# EAGLE board mainboard (EAGLE 7.5.0)
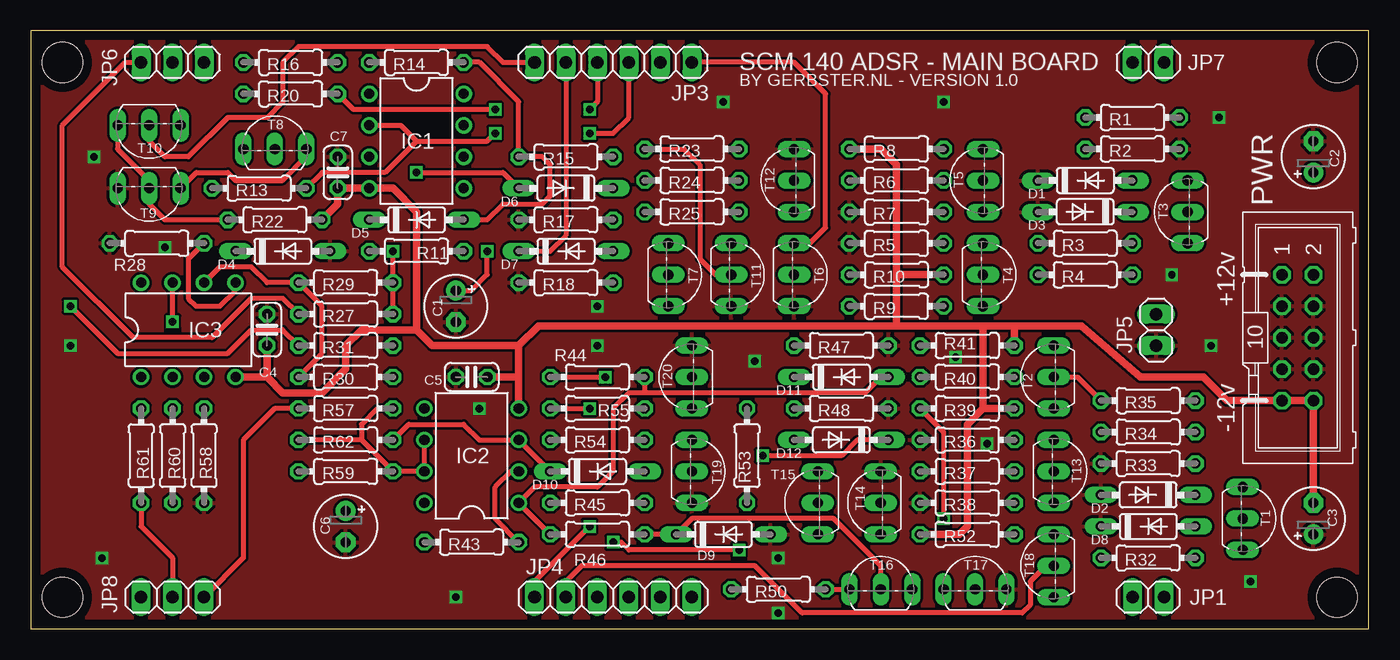
[diagram p0: board, top side]
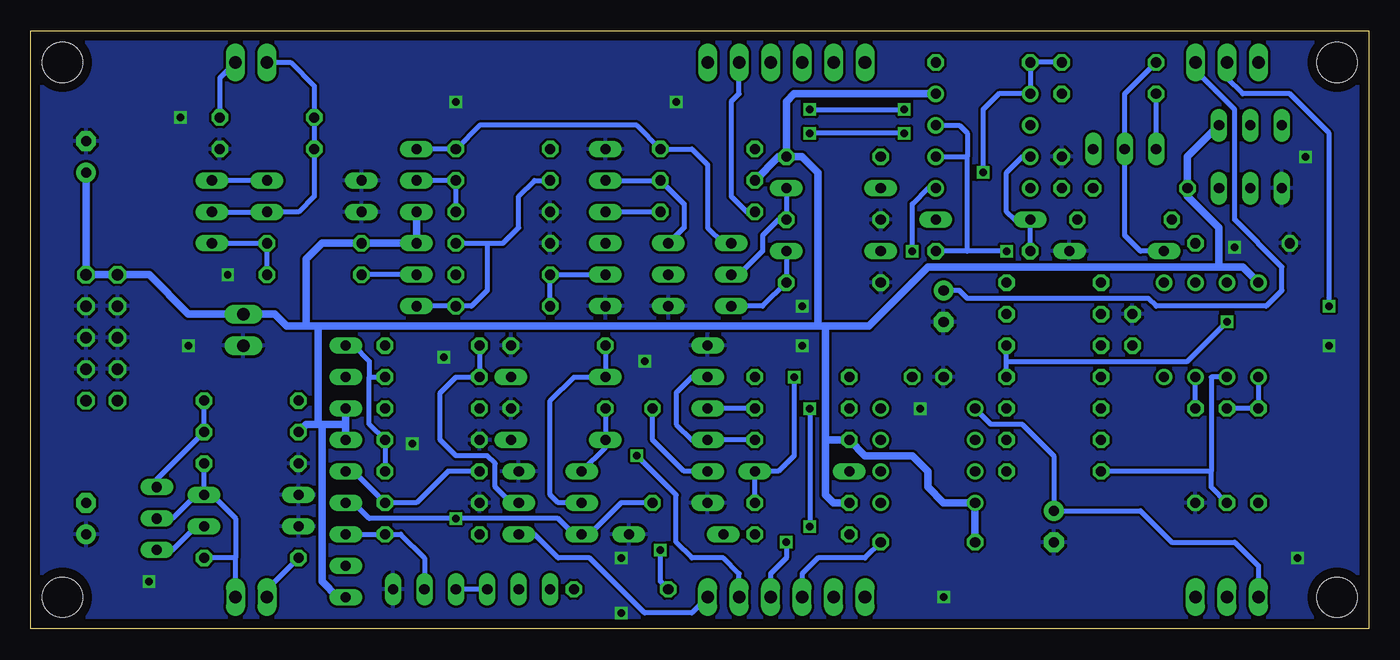
[diagram p1: board, bottom side, seen from below]

Size 107.95 x 48.26 mm. Coordinates in mm from the lower left corner, seen from the top.
Outline: 0,0 107.95,0 107.95,48.26 0,48.26 0,0
Copper layers (1*16): Top 0.035mm / dielectric 1.5mm / Bottom 0.035mm
Design rules "PCBWay": minimum track width 10mil, minimum drill 6mil, track to track 8mil, track to pad 8mil, pad to pad 8mil, via to via 8mil, smd to smd 8mil, copper to edge 30mil, drill to drill 8mil, minimum pad ring 10mil, minimum via ring 8mil, stop-mask expansion 4mil, vias tented up to drill 0mil, thermal gap 10mil
Holes 3.21 mm at 2.54,2.54 2.54,45.72 105.41,45.72 105.41,2.54

## Footprints (pad centres in the part's own frame; a part is rotated, then mirrored left to right if it is on the bottom)
E2,5-5 = drill 0.813 pad 1.6: + -1.27,0 | drill 0.813 pad 1.6 octagon: - 1.27,0
C025-024X044 = drill 0.813 octagon: 1 -1.27,0; 2 1.27,0
DO35-7 = drill 0.813 long: A 3.81,0; C -3.81,0
DIL08 = drill 0.813 pad 1.27: 1 -3.81,-3.81; 2 -1.27,-3.81; 3 1.27,-3.81; 4 3.81,-3.81; 5 3.81,3.81; 6 1.27,3.81; 7 -1.27,3.81; 8 -3.81,3.81
1X02 = drill 1.016 long: 1 -1.27,0; 2 1.27,0
1X06 = drill 1.016 long: 1 -6.35,0; 2 -3.81,0; 3 -1.27,0; 4 1.27,0; 5 3.81,0; 6 6.35,0
1X03 = drill 1.016 long: 1 -2.54,0; 2 0,0; 3 2.54,0
ML10 = drill 0.914 octagon: 1 -5.08,-1.27; 2 -5.08,1.27; 3 -2.54,-1.27; 4 -2.54,1.27; 5 0,-1.27; 6 0,1.27; 7 2.54,-1.27; 8 2.54,1.27; 9 5.08,-1.27; 10 5.08,1.27
0204/7 = drill 0.813 octagon: 1 -3.81,0; 2 3.81,0
TO92-CBE = drill 0.813 long: B 0,0; C -2.54,0; E 2.54,0
TO92-EBC = drill 0.813 long: B 0,-1.27; C 2.54,-1.27; E -2.54,-1.27

## Placement (x,y rotation side)
C1  3.3u/35v  [E2,5-5]  34.29,26.04 270 top
C2  47u/16v  [E2,5-5]  103.5,38.1 90 top
C3  47u/16v  [E2,5-5]  103.5,8.89 90 top
C4  0.01u  [C025-024X044]  19.05,24.13 90 top
C5  0.01u  [C025-024X044]  35.56,20.32 180 top
C6  3.3u/35v  [E2,5-5]  25.4,8.26 270 top
C7  0.01u  [C025-024X044]  24.77,36.83 90 top
D1  [DO35-7]  85.09,33.66 180 top
D2  [DO35-7]  90.17,10.79 180 top
D3  [DO35-7]  85.09,36.2 0 top
D4  [DO35-7]  20.32,30.48 0 top
D5  [DO35-7]  31.11,33.02 0 top
D6  [DO35-7]  43.18,35.56 180 top
D7  [DO35-7]  43.18,30.48 0 top
D8  [DO35-7]  90.17,8.26 0 top
D9  [DO35-7]  55.88,7.62 0 top
D10  [DO35-7]  45.72,12.7 0 top
D11  [DO35-7]  65.41,20.32 0 top
D12  [DO35-7]  65.41,15.24 180 top
IC1  LM4558N  [DIL08]  31.11,39.37 270 top
IC2  LM4558N  [DIL08]  35.56,13.97 90 top
IC3  LM4558N  [DIL08]  12.7,24.13 0 top
JP1  [1X02]  90.17,2.54 180 top
JP3  [1X06]  46.99,45.72 180 top
JP4  [1X06]  46.99,2.54 0 top
JP5  [1X02]  90.81,24.13 90 top
JP6  [1X03]  11.43,45.72 180 top
JP7  [1X02]  90.17,45.72 0 top
JP8  [1X03]  11.43,2.54 0 top
PWR  [ML10]  102.23,23.5 270 top
R1  33k  [0204/7]  88.9,41.27 180 top
R2  22k  [0204/7]  88.9,38.73 180 top
R3  10k  [0204/7]  85.09,31.11 180 top
R4  22k  [0204/7]  85.09,28.57 180 top
R5  10k  [0204/7]  69.85,31.11 0 top
R6  22k  [0204/7]  69.85,36.2 0 top
R7  150k  [0204/7]  69.85,33.66 0 top
R8  47k  [0204/7]  69.85,38.73 0 top
R9  56k  [0204/7]  69.85,26.04 0 top
R10  560k  [0204/7]  69.85,28.57 180 top
R11  47k  [0204/7]  31.11,30.48 0 top
R13  47k  [0204/7]  18.41,35.56 180 top
R14  56k  [0204/7]  31.11,45.72 0 top
R15  22k  [0204/7]  43.18,38.1 0 top
R16  100k  [0204/7]  20.95,45.72 0 top
R17  47k  [0204/7]  43.18,33.02 0 top
R18  33k  [0204/7]  43.18,27.94 0 top
R20  330  [0204/7]  20.95,43.18 0 top
R22  15k  [0204/7]  19.68,33.02 180 top
R23  100k  [0204/7]  53.34,38.73 180 top
R24  10k  [0204/7]  53.34,36.2 180 top
R25  330  [0204/7]  53.34,33.66 180 top
R27  1k  [0204/7]  25.4,25.4 180 top
R28  47k  [0204/7]  10.16,31.11 0 top
R29  100k  [0204/7]  25.4,27.94 0 top
R30  100k  [0204/7]  25.4,20.32 0 top
R31  1k  [0204/7]  25.4,22.86 180 top
R32  33k  [0204/7]  90.17,5.71 0 top
R33  22k  [0204/7]  90.17,13.34 0 top
R34  10k  [0204/7]  90.17,15.88 180 top
R35  22k  [0204/7]  90.17,18.41 180 top
R36  10k  [0204/7]  75.56,15.24 0 top
R37  22k  [0204/7]  75.56,12.7 180 top
R38  150k  [0204/7]  75.56,10.16 0 top
R39  47k  [0204/7]  75.56,17.78 180 top
R40  56k  [0204/7]  75.56,20.32 0 top
R41  560k  [0204/7]  75.56,22.86 180 top
R43  47k  [0204/7]  35.56,6.99 180 top
R44  56k  [0204/7]  45.72,20.32 180 top
R45  22k  [0204/7]  45.72,10.16 180 top
R46  100k  [0204/7]  45.72,7.62 180 top
R47  47k  [0204/7]  65.41,22.86 180 top
R48  33k  [0204/7]  65.41,17.78 180 top
R50  330  [0204/7]  60.33,3.17 180 top
R52  15k  [0204/7]  75.56,7.62 0 top
R53  100k  [0204/7]  57.78,13.97 90 top
R54  10k  [0204/7]  45.72,15.24 180 top
R55  330  [0204/7]  45.72,17.78 180 top
R57  1k  [0204/7]  25.4,17.78 180 top
R58  47k  [0204/7]  13.97,13.97 90 top
R59  100k  [0204/7]  25.4,12.7 0 top
R60  100k  [0204/7]  11.43,13.97 90 top
R61  1k  [0204/7]  8.89,13.97 270 top
R62  47k  [0204/7]  25.4,15.24 180 top
T1  [TO92-CBE]  97.79,8.89 270 top
T2  [TO92-EBC]  81.28,20.32 90 top
T3  [TO92-CBE]  93.34,33.66 90 top
T4  [TO92-EBC]  78.11,28.57 270 top
T5  [TO92-CBE]  76.83,36.2 90 top
T6  [TO92-CBE]  61.59,28.57 270 top
T7  [TO92-EBC]  52.7,28.57 270 top
T8  [TO92-CBE]  19.68,38.73 0 top
T9  [TO92-EBC]  9.53,34.29 180 top
T10  [TO92-CBE]  9.53,40.64 180 top
T11  [TO92-CBE]  56.52,28.57 270 top
T12  [TO92-CBE]  61.59,36.2 90 top
T13  [TO92-CBE]  82.55,12.7 270 top
T14  [TO92-CBE]  68.58,10.16 90 top
T15  [TO92-EBC]  62.23,10.16 90 top
T16  [TO92-CBE]  68.58,3.17 0 top
T17  [TO92-EBC]  76.2,4.45 0 top
T18  [TO92-CBE]  82.55,5.08 90 top
T19  [TO92-CBE]  53.34,12.7 270 top
T20  [TO92-CBE]  53.34,20.32 90 top

## Library data of the parts
C1-C7 R1-R11 R13-R18 R20 R22-R25 R27-R41 R43-R48 R50 R52-R55 R57-R62 = resistor
D1-D12 = diode
IC1-IC3 = linear
JP1 JP3-JP8 = pinhead
PWR = con-ml; OC_FARNELL: unknown; OC_NEWARK: unknown
T1-T20 = transistor

## Nets
+12V: C2.+ IC1.8 IC2.8 IC3.8 JP5.2 PWR.1 PWR.2 R3.2 R13.2 R15.2 R24.2 R34.2 R43.2 R45.2 R54.2 T2.E T4.E T5.C T10.C T13.C T18.C
-12V: C3.- C4.1 C5.1 C7.1 IC1.4 IC2.4 IC3.4 PWR.9 PWR.10 R8.1 R10.1 R22.1 R39.1 R41.1 R52.1
A1-IN: D7.C JP3.5
A2-IN: D12.C JP4.5
C1-OUT: C1.+ IC1.5 JP6.1
C2-OUT: C6.+ IC2.5 JP8.1
D1-IN: JP3.4 R20.2
D2-IN: JP4.4 R50.2
GATE-1: JP7.2 R1.1
GATE-2: JP1.2 R32.1
GND: C1.- C2.- C3.+ C4.2 C5.2 C6.- C7.2 D1.A D2.A D3.C D4.A D8.C D9.A JP5.1 PWR.3 PWR.4 PWR.5 PWR.6 PWR.7 PWR.8 R2.1 R5.1 R7.1 R17.1 R18.1 R28.1 R33.1 R36.1 R38.1 R47.1 R48.1 R58.1 T6.E T9.C T11.E T12.E T14.E T17.C T19.E T20.E
INV-OUT-1: JP6.2 R31.2
INV-OUT-2: JP8.2 R61.2
MANUAL-TRIGGER-1: D1.C JP7.1 R1.2 R2.2 T3.B
MANUAL-TRIGGER-2: D2.C JP1.1 R32.2 R33.2 T1.B
N$1: D5.C IC1.3 R11.1
N$3: D3.A T3.E
N$4: R3.1 R4.1 T3.C
N$5: R4.2 T4.B
N$6: R5.2 R6.1 R9.2 T4.C
N$7: R8.2 R23.1 T5.E T7.E
N$8: R6.2 R7.2 T5.B
N$9: R9.1 R10.2 T6.B
N$12: D6.A IC1.1 R14.1 R16.2
N$13: D4.C R16.1 T8.B
N$14: D5.A R14.2 R15.1
N$15: IC1.6 IC1.7 R11.2 R27.1 R29.2
N$16: D7.A R18.2 T7.C
N$17: D6.C R17.2 T7.B
N$21: IC3.6 R29.1 R30.1
N$23: R20.1 T8.C
N$24: R22.2 T9.B T10.E
N$25: T8.E T9.E
N$26: R23.2 T11.B
N$27: R24.1 T11.C T12.B
N$28: R25.1 T12.C
N$30: IC3.7 R30.2 R31.1
N$32: D8.A T1.E
N$33: IC3.5 R28.2
N$34: R34.1 R35.1 T1.C
N$35: R35.2 T2.B
N$36: R36.2 R37.1 R40.2 T2.C
N$37: R39.2 R53.1 T13.E T15.E
N$38: R37.2 R38.2 T13.B
N$39: R40.1 R41.2 T14.B
N$41: D11.A IC2.1 R44.1 R46.2
N$42: D9.C R46.1 T16.B
N$43: D10.A R44.2 R45.1
N$44: IC2.6 IC2.7 R57.1 R59.2 R62.2
N$45: D11.C R47.2 T15.B
N$46: D12.A R48.2 T15.C
N$48: R50.1 T16.C
N$51: R52.2 T17.B T18.E
N$52: T16.E T17.E
N$53: R53.2 T19.B
N$54: R54.1 T19.C T20.B
N$55: R55.1 T20.C
N$58: IC3.2 R59.1 R60.1
N$59: IC3.1 R60.2 R61.1
N$60: IC3.3 R58.2
N$61: D10.C IC2.3 R62.1
NORM-OUT-1: JP6.3 R27.2
NORM-OUT-2: JP8.3 R57.2
R1-IN: JP3.2 R25.2
R2-IN: JP4.1 R55.2
S1-A: IC1.2 JP3.3 R13.1
S1-B: JP3.1 T6.C
S1-W: JP3.6 T10.B
S2-A: IC2.2 JP4.3 R43.1
S2-B: JP4.6 T14.C
S2-W: JP4.2 T18.B

## Tracks (layer width: path | path; a pad name or v marks a point on that pad's centre or on a via)
+12V
  Bottom 0.61: T5.C T4.E R3.2 84.45,31.11 85.72,29.84 85.72,24.45 | R15.2 47.62,38.1 R24.2 | T10.C 14.61,38.1 R13.2 14.61,34.92 12.06,32.38 12.06,29.21 | 85.72,24.45 87.31,24.45 88.27,25.4 JP5.2 95.25,25.4 98.42,28.57 PWR.1 PWR.2 C2.+ | R34.2 85.72,16.51 84.77,16.51 | 84.45,16.51 82.55,16.51 | T13.C 82.55,16.51 | 82.55,16.51 T2.E | T18.C 83.19,2.54 84.45,3.81 84.45,16.51 | 84.45,16.51 84.77,16.51 | R43.2 IC2.8 34.29,10.16 35.56,11.43 35.56,12.7 36.83,13.97 40.64,13.97 R54.2 43.81,15.24 | R45.2 43.18,10.16 43.81,10.79 43.81,15.24 | 85.72,24.45 84.77,24.45 | 84.77,24.45 84.77,16.51 | 43.81,15.24 43.81,24.45 | 44.45,24.45 84.77,24.45 | 43.81,24.45 44.45,24.45 | 44.45,24.45 44.45,36.83 45.72,38.1 R15.2 | IC1.8 46.35,43.18 46.99,42.55 R15.2 | IC3.8 10.16,29.21 12.06,29.21 | 12.06,29.21 35.56,29.21 40.32,24.45 43.81,24.45
-12V
  Top 0.61: R22.1 24.77,34.29 C7.1 IC1.4 29.21,35.56 31.11,33.66 31.11,24.13 | R8.1 68.58,38.73 69.85,37.47 69.85,28.57 | 76.83,24.45 76.83,17.78 | 76.83,17.78 R39.1 | C3.- PWR.10 PWR.9 96.52,18.41 94.61,20.32 89.53,20.32 84.77,24.45 79.38,24.45 | 39.37,20.32 C5.1 | R10.1 69.85,28.57 | 69.85,28.57 69.85,24.45 | 69.85,24.45 76.83,24.45 | 76.83,24.45 79.38,24.45 | 79.38,24.45 R41.1 | IC2.4 39.37,20.32 | 39.37,20.32 39.37,22.86 | 69.85,24.45 40.96,24.45 39.37,22.86 | 31.11,24.13 32.38,22.86 39.37,22.86 | IC3.4 19.05,20.32 | C4.1 19.05,20.32 | 19.05,20.32 20.32,19.05 23.5,19.05 25.4,20.95 25.4,22.86 26.67,24.13 31.11,24.13 | R52.1 74.93,7.62 75.56,8.26 75.56,16.51 76.83,17.78
A1-IN
  Top 0.406: D7.C 41.91,30.48 43.18,31.75 JP3.5
A2-IN  (via drill 0.6)
  Top 0.406: D12.C 66.67,15.24 65.41,13.97 v59.05,13.97
  Bottom 0.406: v59.05,13.97 55.88,10.79 55.88,6.99 54.61,5.71 52.07,5.71 50.8,4.45 JP4.5
C1-OUT  (via drill 0.6)
  Top 0.406: C1.+ 35.56,27.3 36.83,28.57 v36.83,30.48
  Bottom 0.406: v36.83,30.48 36.83,34.29 35.56,35.56 IC1.5 | C1.+ 33.02,27.3 32.38,26.67 17.78,26.67 17.14,26.04 8.26,26.04 6.99,27.3 6.99,29.21 10.79,33.02 10.79,41.91 13.97,45.09 JP6.1
C2-OUT
  Bottom 0.406: IC2.5 30.48,16.51 27.94,16.51 25.4,13.97 C6.+ 18.41,9.53 15.88,6.99 10.79,6.99 8.89,5.08 JP8.1
D1-IN  (via drill 0.6)
  Top 0.406: JP3.4 45.72,42.55 v45.09,41.91 | v37.47,41.91 26.04,41.91 R20.2
  Bottom 0.406: v45.09,41.91 v37.47,41.91
D2-IN  (via drill 0.6)
  Top 0.406: v57.15,6.35 48.26,6.35 47.62,6.99 v46.99,6.99
  Bottom 0.406: R50.2 57.15,3.81 v57.15,6.35 | v46.99,6.99 46.99,5.71 48.26,4.45 JP4.4
GATE-1
  Bottom 0.406: JP7.2 92.71,44.45 R1.1
GATE-2
  Bottom 0.406: R32.1 88.9,3.17 JP1.2
GND  (via drill 0.6)
  other vias: 3.17,22.86 5.71,5.71 5.08,38.1 55.88,42.55 73.66,42.55 95.89,41.27 92.08,28.57 98.42,3.81 60.33,1.27 45.72,22.86 45.72,26.04 58.42,21.59 36.2,17.78 34.29,2.54 95.25,22.86 60.33,5.71 74.61,21.91 77.15,14.92 10.79,30.8
  pour Top: 0,48.26 0,0 107.95,0 107.95,48.26
  pour Bottom: 0,48.26 0,0 107.95,0 107.95,48.26
INV-OUT-1  (via drill 0.6)
  Top 0.406: v3.17,26.04 6.99,22.23 15.88,22.23 17.78,24.13 20.32,24.13 R31.2
  Bottom 0.406: v3.17,26.04 3.17,40.01 6.35,43.18 10.16,43.18 11.43,44.45 JP6.2
INV-OUT-2
  Top 0.406: R61.2 8.89,8.26 11.43,5.71 JP8.2
MANUAL-TRIGGER-1
  Bottom 0.406: T3.B D1.C 86.36,33.66 85.09,34.92 R2.2 R1.2 85.09,43.81 87,45.72 JP7.1
MANUAL-TRIGGER-2
  Bottom 0.406: JP1.1 91.44,5.71 | 91.44,5.71 R32.2 | D2.C 94.61,10.79 96.52,8.89 T1.B | D2.C 93.34,10.79 91.44,8.89 91.44,5.71 | D2.C R33.2
N$1
  Bottom 0.406: R11.1 D5.C 28.57,33.02 29.21,33.66 29.21,36.83 27.94,38.1 IC1.3
N$3
  Bottom 0.406: D3.A T3.E
N$4
  Bottom 0.406: T3.C R3.1 R4.1
N$5
  Bottom 0.406: T4.B R4.2
N$6
  Bottom 0.406: 71.12,31.11 71.12,27.3 72.39,26.04 R9.2 T4.C | R5.2 71.12,31.11 | 71.12,31.11 69.85,31.11 68.58,32.38 68.58,34.92 67.31,36.2 R6.1
N$7
  Bottom 0.406: T7.E 52.07,31.11 53.34,32.38 53.34,37.47 54.61,38.73 R23.1 59.05,40.64 71.75,40.64 R8.2 T5.E
N$8
  Bottom 0.406: R7.2 R6.2 T5.B
N$9
  Bottom 0.406: R9.1 R10.2 T6.B
N$12  (via drill 0.6)
  Top 0.406: v31.11,36.83 38.1,36.83 D6.A
  Bottom 0.406: R16.2 R14.1 IC1.1 29.84,43.18 31.11,41.91 v31.11,36.83
N$13
  Bottom 0.406: R16.1 19.68,43.18 T8.B 19.68,31.75 18.41,30.48 D4.C
N$14
  Top 0.406: D5.A 36.83,33.02 38.1,34.29 41.27,34.29 41.91,34.92 41.91,37.47 41.27,38.1 R15.1 39.37,42.55 36.2,45.72 R14.2
N$15  (via drill 0.6)
  Top 0.406: R27.1 R29.2 v29.21,30.48
  Bottom 0.406: IC1.7 33.02,40.64 32.38,40.01 32.38,38.1 | v29.21,30.48 32.38,30.48 | 32.38,30.48 32.38,38.1 | 32.38,30.48 R11.2 | IC1.6 32.38,38.1
N$16
  Bottom 0.406: D7.A R18.2 48.9,26.04 T7.C
N$17
  Bottom 0.406: D6.C R17.2 47.62,33.02 48.9,31.75 48.9,30.48 50.8,28.57 T7.B
N$21
  Top 0.406: R30.1 23.5,22.23 23.5,26.04 R29.1 19.05,27.94 17.78,29.21 15.24,29.21 IC3.6
N$23
  Bottom 0.406: T8.C R20.1
N$24
  Top 0.406: T10.E 6.99,38.73 9.53,36.2 T9.B 9.53,34.29 10.79,33.02 R22.2
N$25
  Top 0.406: T9.E 13.34,36.83 15.88,36.83 16.51,36.2 20.32,36.2 22.23,38.1 T8.E
N$26
  Top 0.406: R23.2 52.7,38.73 53.98,37.47 53.98,29.84 55.24,28.57 T11.B
N$27
  Bottom 0.406: T12.B R24.1 55.24,34.29 55.24,32.38 T11.C
N$28
  Bottom 0.406: R25.1 T12.C
N$30  (via drill 0.6)
  Top 0.406: v11.43,24.77 IC3.7
  Bottom 0.406: 29.21,21.59 R31.1 | R30.2 29.21,21.59 | 29.21,21.59 14.61,21.59 v11.43,24.77
N$32
  Bottom 0.406: T1.E 96.52,6.35 94.61,8.26 D8.A
N$33
  Top 0.406: R28.2 12.7,29.84 12.7,26.67 13.34,26.04 15.24,26.04 16.51,27.3 IC3.5
N$34
  Bottom 0.406: T1.C 97.79,12.06 R34.1 R35.1
N$35
  Top 0.406: T2.B 84.45,20.32 R35.2
N$36
  Bottom 0.406: T2.C 81.92,22.86 80.64,21.59 80.64,20.32 | 80.64,20.32 R40.2 | 80.64,20.32 80.64,16.51 R36.2 R37.1
N$37  (via drill 0.6)
  Top 0.406: R39.2 73.66,15.88 v73.66,8.89
  Bottom 0.406: R53.1 60.33,10.16 62.87,7.62 T15.E 64.14,7.62 65.41,8.89 v73.66,8.89 80.64,8.89 81.92,10.16 T13.E
N$38
  Bottom 0.406: R37.2 74.3,12.7 76.83,10.16 R38.2 81.92,12.7 T13.B
N$39
  Bottom 0.406: R41.2 R40.1 73.66,20.32 74.93,19.05 74.93,15.24 73.66,13.97 71.12,13.97 70.48,13.34 70.48,11.43 69.22,10.16 T14.B
N$41
  Top 0.406: R46.2 IC2.1 40.64,11.43 45.72,11.43 46.99,12.7 46.99,17.78 48.26,19.05 49.53,19.05 | D11.A 68.58,20.32 67.31,19.05 49.53,19.05 | R44.1 49.53,19.05
N$42
  Top 0.406: R46.1 D9.C 53.34,8.89 64.77,8.89 68.58,5.08 T16.B
N$43  (via drill 0.6)
  Top 0.406: R44.2 v46.35,20.32
  Bottom 0.406: R45.1 D10.A 47.62,12.7 46.35,13.97 v46.35,20.32
N$44
  Top 0.406: 26.67,15.24 R62.2 | IC2.6 IC2.7 R59.2 26.67,15.24 | R57.1 27.94,17.78 26.67,16.51 26.67,15.24
N$45
  Bottom 0.406: R47.2 D11.C 64.14,20.32 66.04,18.41 66.04,10.79 65.41,10.16 T15.B
N$46
  Bottom 0.406: R48.2 D12.A 61.59,14.61 T15.C
N$48
  Top 0.406: R50.1 T16.C
N$51
  Bottom 0.406: T18.E R52.2 78.11,7.62 76.2,5.71 T17.B
N$52
  Bottom 0.406: T16.E T17.E
N$53
  Bottom 0.406: T19.B 55.24,12.7 57.78,15.24 R53.2
N$54
  Bottom 0.406: R54.1 T19.C 54.61,15.24 55.88,16.51 55.88,19.05 54.61,20.32 T20.B
N$55
  Bottom 0.406: R55.1 T20.C
N$58
  Bottom 0.406: R60.1 12.7,11.43 12.7,12.7 | 12.7,12.7 R59.1 | IC3.2 12.7,20.32 12.7,12.7
N$59
  Bottom 0.406: IC3.1 R61.1 R60.2
N$60
  Bottom 0.406: R58.2 IC3.3
N$61
  Top 0.406: R62.1 30.48,16.51 34.92,16.51 36.2,15.24 IC2.3 D10.C
NORM-OUT-1
  Top 0.406: R27.2 20.32,26.67 17.78,26.67 14.61,23.5 8.26,23.5 2.54,29.21 2.54,40.64 7.62,45.72 JP6.3
NORM-OUT-2
  Top 0.406: R57.2 19.68,17.78 17.14,15.24 17.14,5.71 JP8.3
R1-IN
  Bottom 0.406: R25.2 50.16,33.66 51.44,34.92 51.44,42.55 50.8,43.18 JP3.2
R2-IN  (via drill 0.6)
  Top 0.406: R55.2 v45.09,17.78 | v45.09,8.26 40.64,3.81 JP4.1
  Bottom 0.406: v45.09,17.78 v45.09,8.26
S1-A  (via drill 0.6)
  Top 0.406: R13.1 23.5,36.83 28.57,36.83 31.11,39.37 | 31.11,39.37 36.83,39.37 v37.47,40.01 | v45.09,40.01 46.99,40.01 48.26,41.27 JP3.3 | IC1.2 29.84,40.64 31.11,39.37
  Bottom 0.406: v37.47,40.01 v45.09,40.01
S1-B
  Top 0.406: T6.C 62.87,31.11 64.14,32.38 64.14,43.18 61.59,45.72 JP3.1
S1-W
  Top 0.406: T10.B 9.53,39.37 10.79,38.1 12.7,38.1 15.88,41.27 19.05,41.27 20.32,42.55 20.32,45.72 21.59,46.99 36.83,46.99 38.1,45.72 JP3.6
S2-A
  Top 0.406: R43.1 37.47,8.89 37.47,11.43 38.73,12.7 IC2.2
  Bottom 0.406: R43.1 40.64,5.71 44.45,5.71 45.72,4.45 JP4.3
S2-B
  Bottom 0.406: JP4.6 54.61,1.27 58.42,1.27 62.87,5.71 65.41,5.71 67.31,7.62 T14.C
S2-W
  Top 0.406: T18.B 81.92,5.08 80.64,3.81 80.64,1.91 80.01,1.27 62.23,1.27 58.42,5.08 44.45,5.08 43.18,3.81 JP4.2

## Text on the board
tNames: SCM 140 ADSR - MAIN BOARD | BY GERBSTER.NL - VERSION 1.0 | +12v | -12v